# Altium PCB RP2040_IP_Block.PcbDoc
Units mm, origin at the board's own origin, x right, y up, seen from the top; angles counter-clockwise.
Board outline 50 x 30 mm, 2 copper layers (Top Layer, Bottom Layer), stack 1.65 mm thick; 45 components, 64 nets, 201 pads, 51 vias.
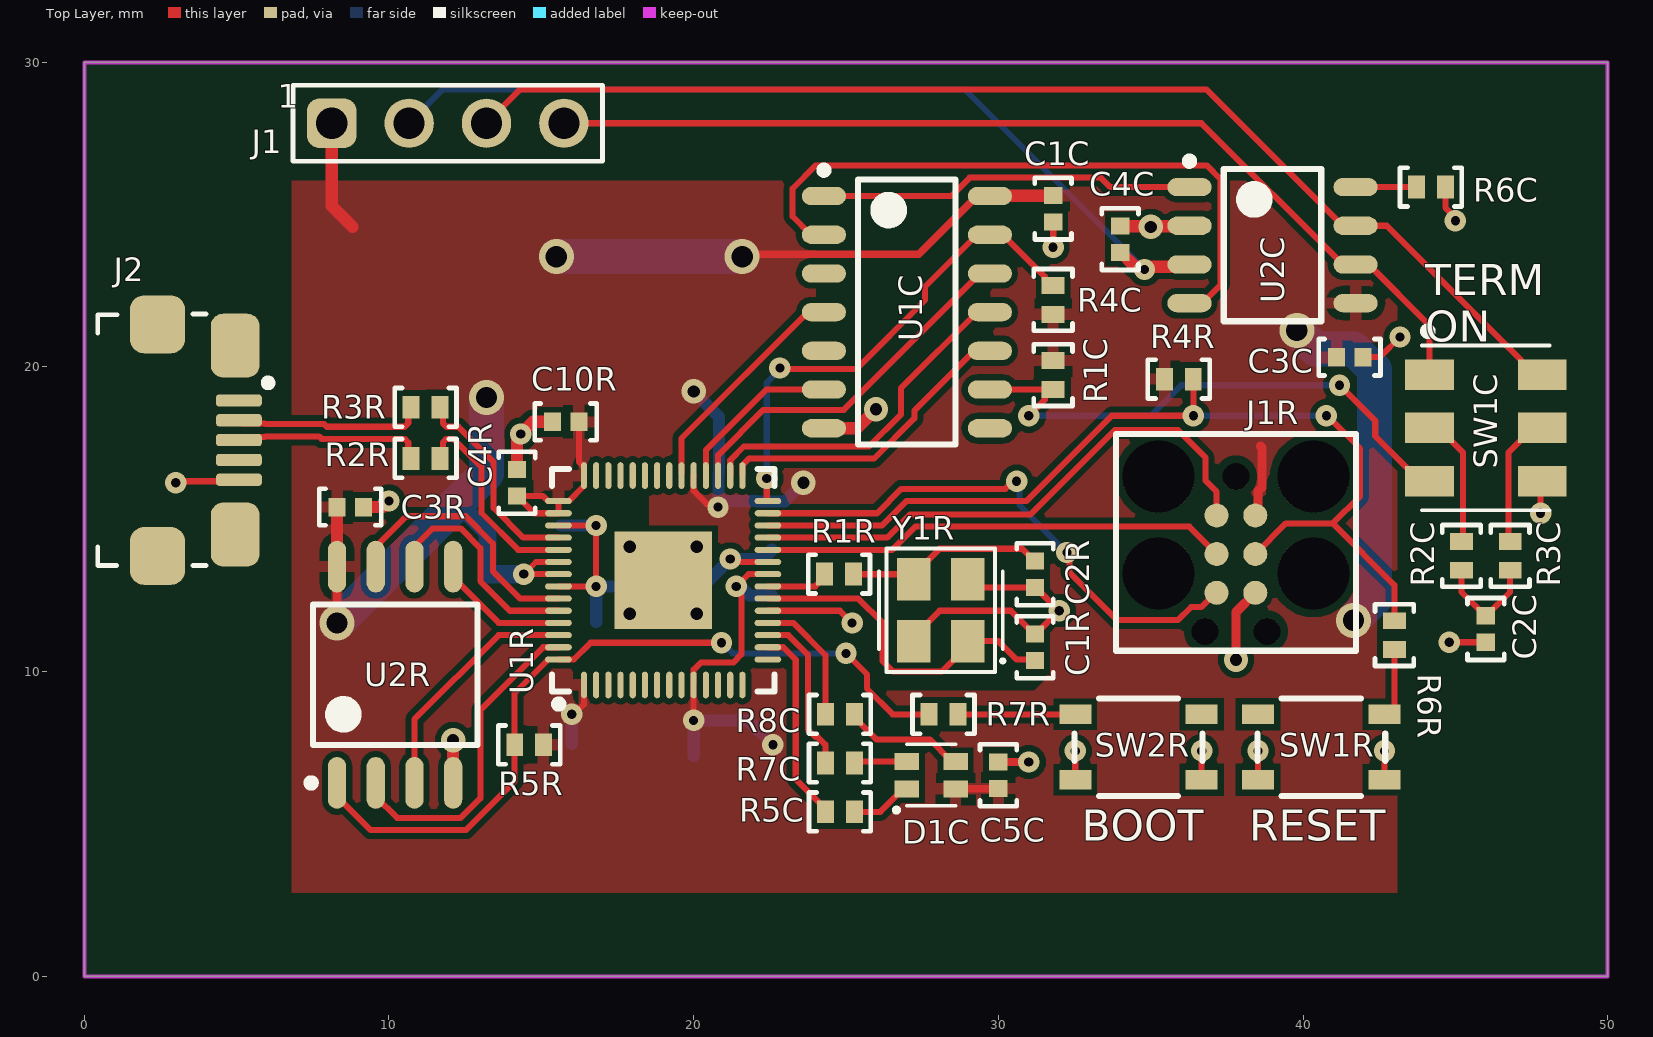
[diagram p0: Top Layer view]
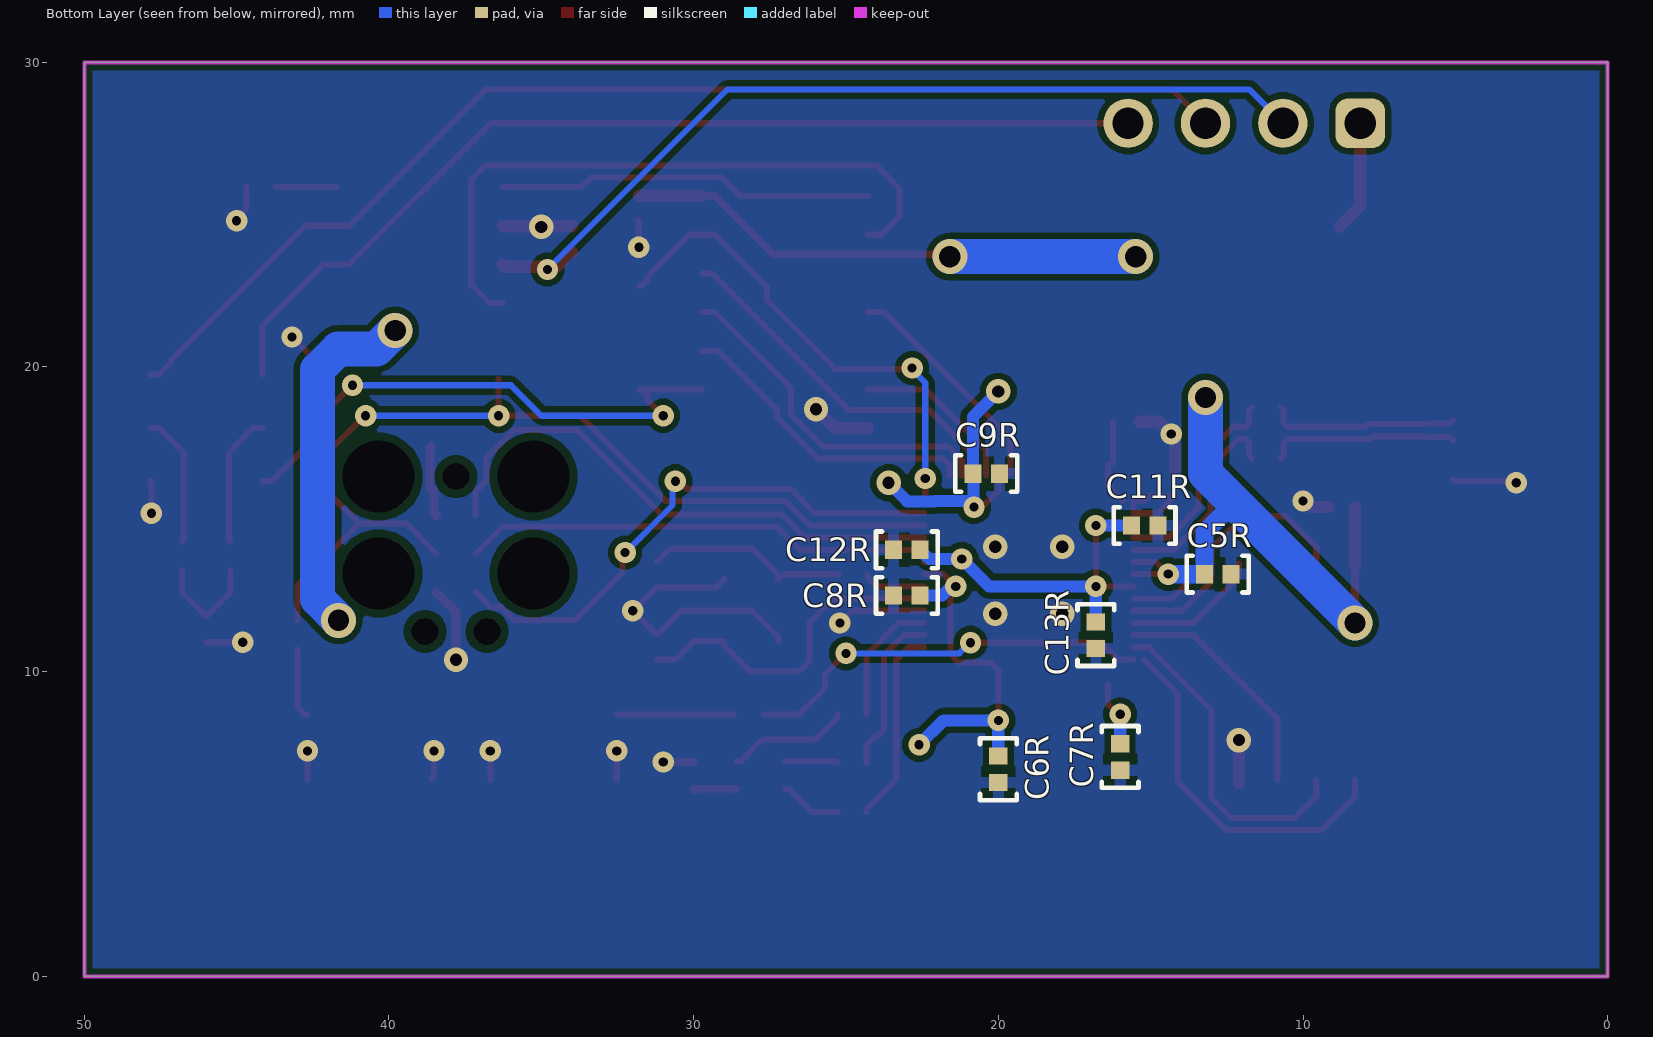
[diagram p1: Bottom Layer view, seen from below]
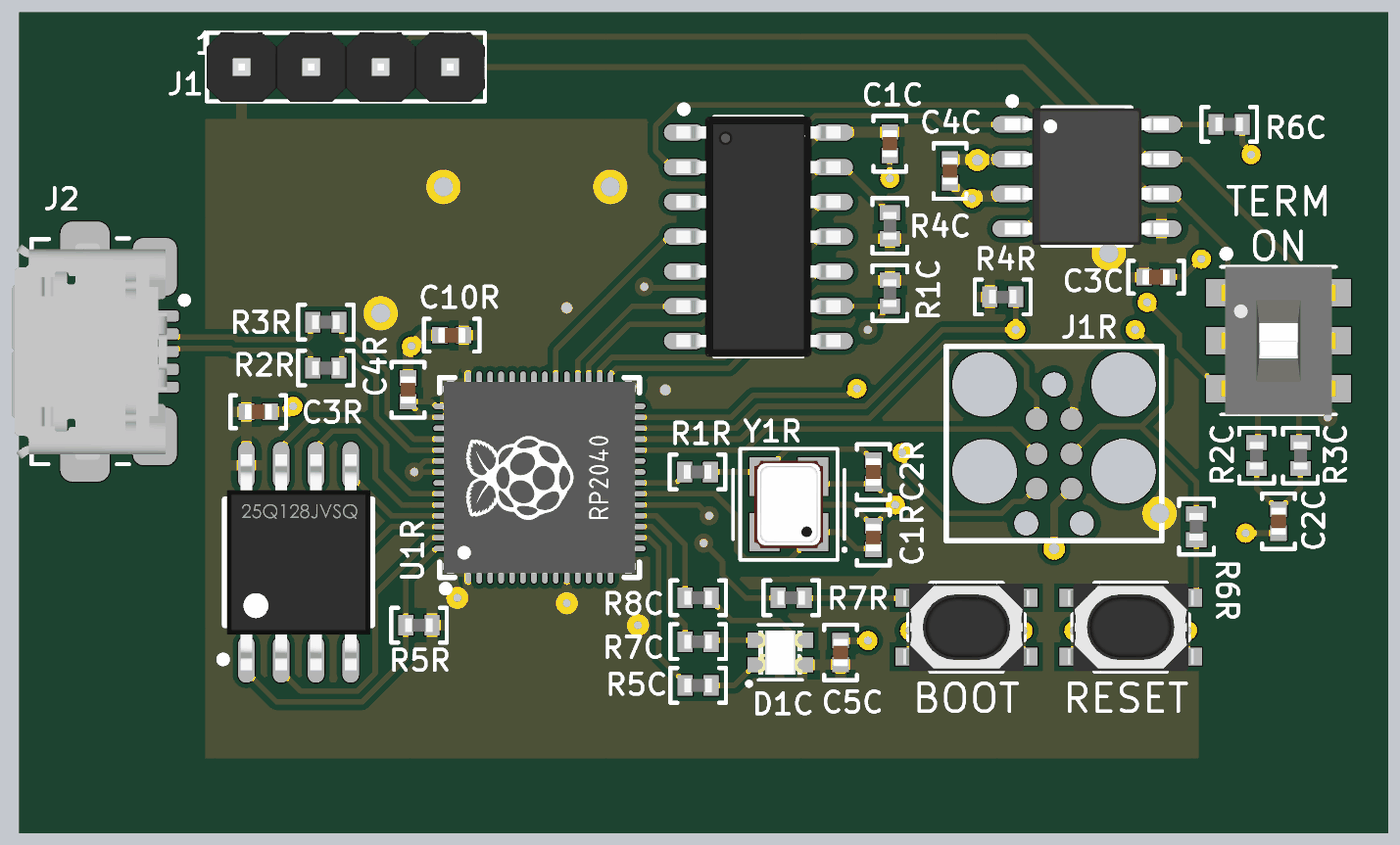
[diagram p2: 3D render of the assembled board from above, using the file's embedded part models]
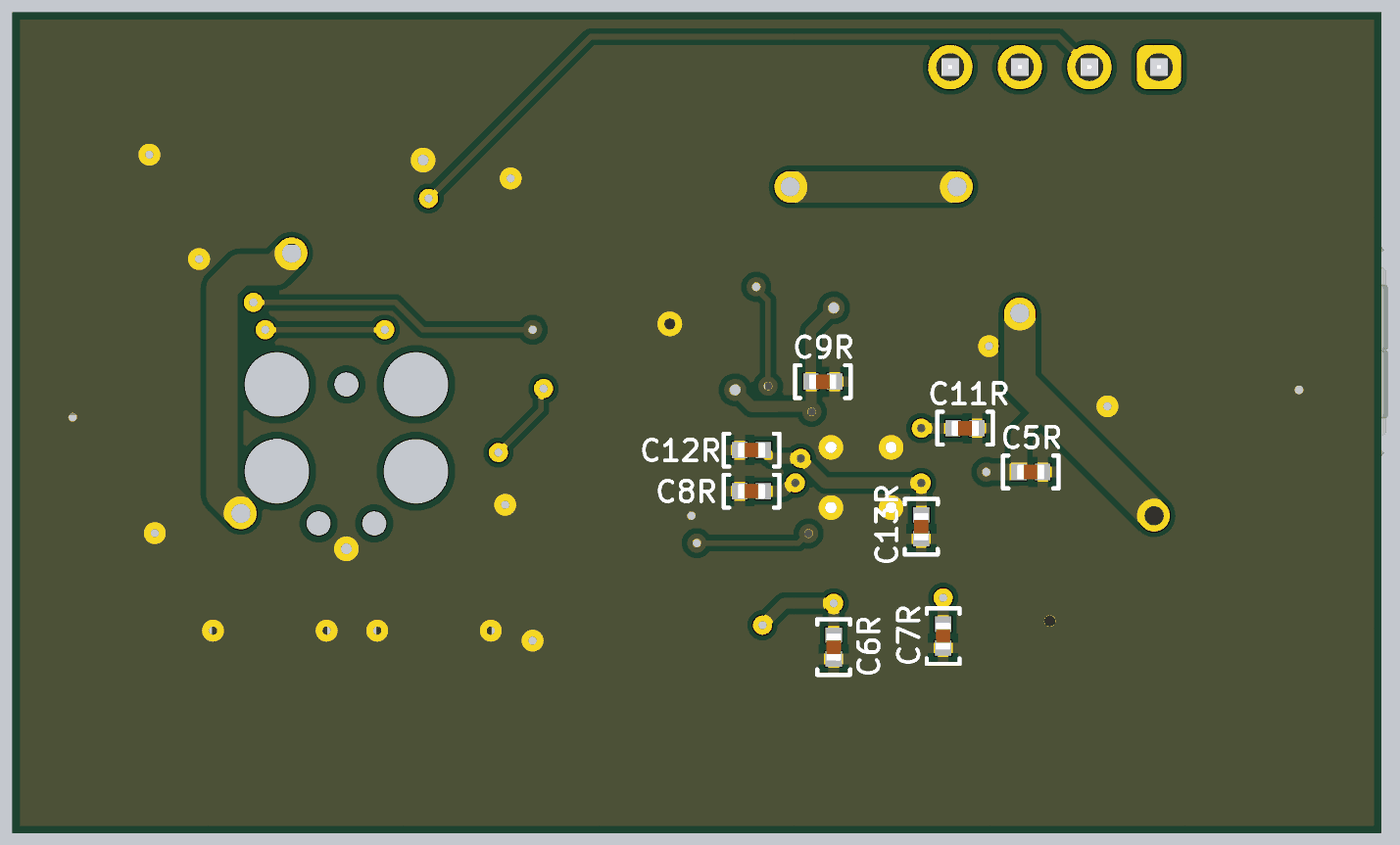
[diagram p3: 3D render of the assembled board from below, using the file's embedded part models]

## Layer stack, top to bottom
Top Solder: solder mask 0.0127, Solder Resist, Dk 3.8
Top Layer: signal copper 0.075
Dielectric: core 1.5, FR-4, Dk 4.5
Bottom Layer: signal copper 0.075
Bottom Solder: solder mask 0.0127, Solder Resist, Dk 3.8

## Board outline
0,0 50,0 50,30 0,30

## Design rules (kind name [scope] priority, off if disabled: settings)
BoardOutlineClearance "BoardOutlineClearance JLCPCB" [All] p1: gap=0.2 ignorepadtopadclearanceinfootprint=FALSE
Clearance "Clearance JLCPCB 2oz" [All] p1: gap=0.2 ignorepadtopadclearanceinfootprint=FALSE except(0.254: Arc-Hole Track-Hole SMDPad-Hole THPad-Hole Via-Hole Fill-Hole Poly-Hole Region-Hole Text-Hole)
ComponentClearance [All] p1: gap=0.15 collisioncheckmode=3 verticalgap=0.25 showdistances=FALSE
DiffPairsRouting [All] p1: maxlimit=0.25 minlimit=0.2 mostfreqgap=0.2 toplayer_minwidth=0.2 toplayer_maxwidth=0.4 toplayer_prefwidth=0.2 bottomlayer_minwidth=0.2 bottomlayer_maxwidth=0.4 bottomlayer_prefwidth=0.2 maxuncoupledlength=12.7
HoleSize "HoleSize JLCPCB Pad" [IsPad] p1: absolutevalues=TRUE maxlimit=6.3 minlimit=0.5 maxpercent=80.000 minpercent=20.000
HoleSize "HoleSize JLCPCB 2 layer" [All] p2: absolutevalues=TRUE maxlimit=6.3 minlimit=0.3 maxpercent=80.000 minpercent=20.000
HoleToHoleClearance "HoleToHoleClearance JLCPCB" [All] p1: gap=0.254 allowstackedmicrovias=TRUE
MinimumAnnularRing "MinimumAnnularRing JLCPCB Pad" [IsPad] p1: minimumring=0.3
MinimumAnnularRing "MinimumAnnularRing JLCPCB 2oz" [All] p2: minimumring=0.2
MinimumSolderMaskSliver [All] p1: minsoldermaskwidth=0.025
PlaneConnect [All] p1: pad.planeconnectstyle=Relief pad.reliefexpansion=0.508 pad.reliefentries=4 pad.reliefconductorwidth=0.254 pad.reliefairgap=0.254 via.planeconnectstyle=Direct via.reliefexpansion=0.508 via.reliefentries=4 via.reliefconductorwidth=0.254 via.reliefairgap=0.254
PolygonConnect [All] p1: thpad.connectstyle=Relief thpad.reliefconductorwidth=0.381 thpad.reliefentries=4 thpad.polygonreliefangle="45 Angle" thpad.airgapwidth=0.254 smdpad.connectstyle=Relief smdpad.reliefconductorwidth=0.381 smdpad.reliefentries=4 smdpad.polygonreliefangle="90 Angle" smdpad.airgapwidth=0.254 via.connectstyle=Direct via.reliefconductorwidth=0.254 via.reliefentries=4 via.polygonreliefangle="90 Angle" via.airgapwidth=0.254
RoutingVias "RoutingVias JLCPCB" [All] p1: holewidth=0.4 width=0.8 viastyle="Through Hole" minholewidth=0.3 minwidth=0.4 maxholewidth=0.711 maxwidth=1.27
SilkToSilkClearance [All] p1: silktosilkclearance=0.076
SilkToSolderMaskClearance "SilkToSolderMaskClearance JLCPCB" [IsPad] p1: minsilkscreentomaskgap=0.15 clearancetoexposedcopper=TRUE
SolderMaskExpansion "SolderMaskExpansion JLCPCB" [All] p1: expansion=0.05 istentingtop=FALSE
Width "Width JLCPCB 2oz" [All] p1: maxlimit=5.08 minlimit=0.2 preferedwidth=0.254 minimp=50.000000 maximp=50.000000 favimp=50.000000
22 further rules are at their usual default settings.

## Classes and differential pairs
differential pair class "USB 2.0": USB USB_RP2040
component class U_RP2040_with_CAN: C1C C2C C3C C4C C5C D1C R1C R2C R3C R4C R5C R6C R7C R8C SW1C U1C U2C
component class U_RP2040_C: C1R C2R C3R C4R C5R C6R C7R C8R C9R C10R C11R C12R C13R J1R R1R R2R R3R R4R R5R R6R R7R SW1R SW2R U1R U2R Y1R
component class Top_Level: J2
differential pair USB: +USB_P -USB_N
differential pair USB_RP2040: +USB_RP2040_P -USB_RP2040_N

## Components (designator, comment, footprint, x,y, rotation, side; value= is the part's Value field where it differs from the comment)
C1C "100nF Ceramic 25V" CAPACITOR_0402 31.8,25.2 r270 top value=0.1uF
C1R "27pF Ceramic 50V" CAPACITOR_0402 31.2,10.8 r90 top value=27pF
C2C "4700pF Ceramic 25V" CAPACITOR_0402 46,11.4 r90 top value=4.7nF
C2R "27pF Ceramic 50V" CAPACITOR_0402 31.2,13.2 r270 top value=27pF
C3C "100nF Ceramic 25V" CAPACITOR_0402 41.529,20.32 r0 top value=0.1uF
C3R "100nF Ceramic 6.3V" CAPACITOR_0402 8.73,15.4 r0 top value=0.1uF
C4C "100nF Ceramic 25V" CAPACITOR_0402 34,24.2 r90 top value=0.1uF
C4R "1uF Ceramic 16V" CAPACITOR_0402 14.2,16.2 r90 top value=1uF
C5C "1uF Ceramic 16V" CAPACITOR_0402 30,6.6 r90 top value=1uF
C5R "100nF Ceramic 6.3V" CAPACITOR_0402 12.8,13.2 r180 bottom value=0.1uF
C6R "100nF Ceramic 6.3V" CAPACITOR_0402 20,6.8 r270 bottom value=0.1uF
C7R "100nF Ceramic 6.3V" CAPACITOR_0402 16,7.2 r270 bottom value=0.1uF
C8R "100nF Ceramic 6.3V" CAPACITOR_0402 23,12.497 r0 bottom value=0.1uF
C9R "100nF Ceramic 6.3V" CAPACITOR_0402 20.4,16.5 r180 bottom value=0.1uF
C10R "100nF Ceramic 6.3V" CAPACITOR_0402 15.8,18.2 r180 top value=0.1uF
C11R "1uF Ceramic 16V" CAPACITOR_0402 15.2,14.8 r180 bottom value=1uF
C12R "100nF Ceramic 6.3V" CAPACITOR_0402 23,14 r0 bottom value=0.1uF
C13R "100nF Ceramic 6.3V" CAPACITOR_0402 16.8,11.2 r270 bottom value=0.1uF
D1C "EAST1616RGBB4" LED_0606_4SMD 27.8,6.6 r0 top
J1 "HEADER VERT 2.54MM" HEADER_4PIN_2.54MM 8.12,28 r0 top
J1R "TagConnect SWD" TC2030-MCP 37.8,16.4 r270 top
J2 "USB_MICRO R/A" CONN_MINIUSB 2.4,17.6 r270 top
R1C "10k Ohm 1% 1/16W" RESISTOR_0402 31.8,19.735 r270 top
R1R "1k Ohm 1% 1/16W" RESISTOR_0402 24.773,13.2 r0 top
R2C "60.4 Ohm 1% 1/16W" RESISTOR_0402 45.2,13.8 r270 top
R2R "27 Ohm 1% 1/16W" RESISTOR_0402 11.2,17 r0 top
R3C "60.4 Ohm 1% 1/16W" RESISTOR_0402 46.8,13.8 r270 top
R3R "27 Ohm 1% 1/16W" RESISTOR_0402 11.2,18.677 r0 top
R4C "10k Ohm 1% 1/16W" RESISTOR_0402 31.8,22.2 r90 top
R4R "10k Ohm 1% 1/16W" RESISTOR_0402 35.925,19.6 r0 top
R5C "604 Ohm 1% 1/16W" RESISTOR_0402 24.8,5.4 r0 top
R5R "10k Ohm 1% 1/16W" RESISTOR_0402 14.6,7.6 r180 top
R6C "10k Ohm 1% 1/16W" RESISTOR_0402 44.2,25.905 r0 top
R6R "1k Ohm 1% 1/16W" RESISTOR_0402 43,11.2 r90 top
R7C "200 Ohm 1% 1/16W" RESISTOR_0402 24.8,7 r0 top
R7R "1k Ohm 1% 1/16W" RESISTOR_0402 28.2,8.6 r180 top
R8C "200 Ohm 1% 1/16W" RESISTOR_0402 24.8,8.6 r0 top
SW1C "Switch DPDT" CAS-220TA 46,18 r270 top
SW1R "434123025826" SMD_434123025826 40.6,7.525 r0 top
SW2R "434123025826" SMD_434123025826 34.6,7.525 r0 top
U1C "MCP2517FD" SOIC-14 27,21.8 r0 top
U1R "RP2040" "QFN-56 RP2040" 19,13 r90 top locked
U2C "CAN Transceiver" SOIC-8 39,24 r0 top
U2R "W25Q128JVSIQ" "SOIC-8 W25QxJV" 10.2,9.899 r90 top
Y1R "CRYSTAL 12.0000MHZ 18PF SMD" "4-SMD, NO LEAD CRYSTAL 3.2x2.5mm" 29,11 r90 top

## Footprints (in the part's own frame and the unit in brackets; to place one, negate y for a bottom-side part, rotate by r counter-clockwise, add the part's x,y. Pads: shape width x height; smd on the part's side, far side on the other; paste and mask are expansions set on the pad)
"4-SMD, NO LEAD CRYSTAL 3.2x2.5mm" [mm]
  rrect0% 1.4x1.1 smd: 1(0,0) 2(2.032,0) 3(2.032,1.778) 4(0,1.778)
  silkscreen extent -1.02,-1.2 3.05,2.92, body extent -0.58,-0.36 2.62,2.14, height 0.82
CAPACITOR_0402 [mm]
  rect 0.56x0.6 smd: 1(-0.435,0) 2(0.435,0)
  silkscreen extent -1.02,-0.6 1.02,0.6, body extent -0.5,-0.28 0.5,0.27, height 0.51
CAS-220TA [mm] "SWITCH SLIDE DPDT 100MA 6V"
  rrect0% 1x1.6 smd: 1(-1.75,-1.85) 2(0,-1.85) 3(1.75,-1.85) 4(-1.75,1.85) 5(0,1.85) 6(1.75,1.85)
  silkscreen extent -3.3,-2.1 2.7,2.1, body extent -2.7,-2.1 2.7,2.1, height 2.51
CONN_MINIUSB [mm] "USB2.0 Micro-B Receptacle SMD R/A"
  rrect50% 0.4x1.5 smd: 1(-1.3,2.675) 2(-0.65,2.675) 3(0,2.675) 4(0.65,2.675) 5(1.3,2.675)
  rrect50% 2.1x1.6 smd: 6(-3.1,2.55) 7(3.1,2.55)
  rrect50% 1.9x1.8 smd: 8(3.8,0) 9(-3.8,0)
  silkscreen extent -4.14,-1.96 4.11,3.75, body extent -3.96,-2.67 3.96,2.99, height 2.72
HEADER_4PIN_2.54MM [mm]
  rrect50% 1.62x1.62 hole 1.02: 1(0,0)
  round 1.62 hole 1.02: 2(2.54,0) 3(5.08,0) 4(7.62,0)
  silkscreen extent -1.27,-1.25 8.89,1.25, body extent -1.27,-1.27 8.89,1.27, height 10.48
LED_0606_4SMD [mm]
  rrect0% 0.8x0.55 smd: 1(-0.8,-0.45) 2(-0.8,0.45) 3(0.8,0.45) 4(0.8,-0.45)
  silkscreen extent -1.22,-1.22 0.8,1.02, body extent -0.8,-0.8 0.8,0.8, height 0.35
"QFN-56 RP2040" [mm] "QFN, 56-Leads, Body 7.00x7.00mm, Pitch 0.40mm, Thermal Pad 3.10x3.10mm, IPC Medium Density"
  oval 0.875x0.2 smd: 1(-3.437,2.6) 2(-3.437,2.2) 3(-3.437,1.8) 4(-3.437,1.4) 5(-3.437,1) 6(-3.437,0.6) 7(-3.437,0.2) 8(-3.437,-0.2) 9(-3.437,-0.6) 10(-3.437,-1) 11(-3.437,-1.4) 12(-3.437,-1.8) 13(-3.437,-2.2) 14(-3.437,-2.6) 29(3.437,-2.6) 30(3.437,-2.2) 31(3.437,-1.8) 32(3.437,-1.4) 33(3.437,-1) 34(3.437,-0.6) 35(3.437,-0.2) 36(3.437,0.2) 37(3.437,0.6) 38(3.437,1) 39(3.437,1.4) 40(3.437,1.8) 41(3.437,2.2) 42(3.437,2.6)
  oval 0.2x0.875 smd: 15(-2.6,-3.437) 16(-2.2,-3.437) 17(-1.8,-3.437) 18(-1.4,-3.437) 19(-1,-3.437) 20(-0.6,-3.437) 21(-0.2,-3.437) 22(0.2,-3.437) 23(0.6,-3.437) 24(1,-3.437) 25(1.4,-3.437) 26(1.8,-3.437) 27(2.2,-3.437) 28(2.6,-3.437) 43(2.6,3.437) 44(2.2,3.437) 45(1.8,3.437) 46(1.4,3.437) 47(1,3.437) 48(0.6,3.437) 49(0.2,3.437) 50(-0.2,3.437) 51(-0.6,3.437) 52(-1,3.437) 53(-1.4,3.437) 54(-1.8,3.437) 55(-2.2,3.437) 56(-2.6,3.437)
  rect 3.2x3.2 smd: 57(0,0)
  silkscreen extent -4.19,-3.65 3.65,3.65, body extent -3.52,-3.52 3.52,3.52, height 0.85
RESISTOR_0402 [mm] "Resistor 0402"
  rect 0.55x0.75 smd: 1(-0.475,0) 2(0.475,0)
  silkscreen extent -1.02,-0.64 1.02,0.64, body extent -0.5,-0.25 0.5,0.25, height 0.25
SMD_434123025826 [mm]
  rect 1.05x0.65 smd: A1(-2.075,1.075) A2(2.075,1.075) B1(-2.075,-1.075) B2(2.075,-1.075)
  silkscreen extent -2.1,-1.6 2.1,1.6, body extent -2.3,-1.6 2.3,1.6, height 2.5
SOIC-8 [mm] "SOIC, 8-Leads, Body 4.90x3.90mm, Pitch 1.27mm, IPC Medium Density"
  oval 1.45x0.6 smd: 1(-2.725,1.905) 2(-2.725,0.635) 3(-2.725,-0.635) 4(-2.725,-1.905) 5(2.725,-1.905) 6(2.725,-0.635) 7(2.725,0.635) 8(2.725,1.905)
  silkscreen extent -2.85,-2.5 1.6,2.88, body extent -3,-2.5 3,2.5, height 1.75
"SOIC-8 W25QxJV" [mm] "SOIC, 8-Leads, Body 5.28x5.28mm, Pitch 1.27mm, IPC Medium Density"
  oval 1.7x0.6 smd: 1(-3.55,1.905) 2(-3.55,0.635) 3(-3.55,-0.635) 4(-3.55,-1.905) 5(3.55,-1.905) 6(3.55,-0.635) 7(3.55,0.635) 8(3.55,1.905)
  silkscreen extent -3.67,-2.7 2.3,2.88, body extent -3.95,-2.62 3.95,2.62, height 1.95
SOIC-14 [mm] "SOIC, 14-Leads, Body 8.65x3.90mm, Pitch 1.27mm, IPC Medium Density"
  oval 1.45x0.6 smd: 1(-2.725,3.81) 2(-2.725,2.54) 3(-2.725,1.27) 4(-2.725,0) 5(-2.725,-1.27) 6(-2.725,-2.54) 7(-2.725,-3.81) 8(2.725,-3.81) 9(2.725,-2.54) 10(2.725,-1.27) 11(2.725,0) 12(2.725,1.27) 13(2.725,2.54) 14(2.725,3.81)
  silkscreen extent -2.85,-4.35 1.6,4.78, body extent -3,-4.4 3,4.4, height 1.7
TC2030-MCP [mil]
  round 31 smd: 1(50,-25) 2(50,25) 3(100,-25) 4(100,25) 5(150,-25) 6(150,25)
  round 34 hole 35 unplated: A(0,0) B(200,40) C(200,-40)
  round 92 hole 93 unplated: D(0,-100) E(125,-100) F(0,100) G(125,100)
  silkscreen extent -55,-155 225,155

## Part data
C1C C3C C3R C4C C5R C6R C7R C8R C9R C10R C12R C13R: library part CAPACITOR_0.1uF_0402, "Cap 100nF 25V +/-10% / Ceramic 0402", Supplier Part Number 1=478-7868-1-ND, Tolerance="+/- 10%", Voltage=25V, Made By="Robert Pafford", Supplier 1=Digi-Key
C1R C2R: library part CAPACITOR_0.000027uF_0402, "Cap 27pF 50V +/-5% / Ceramic 0402", Supplier Part Number 1=445-5589-1-ND, Tolerance="+/- 5%", Voltage=50V, Made By="Robert Pafford", Supplier 1=Digi-Key
C2C: library part CAPACITOR_0.0047uF_0402, "4700 pF +/-10% 25V Ceramic Capacitor X7R 0402", Supplier Part Number 1=478-6195-1-ND, Tolerance="+/- 10%", Voltage=25V, Made By="Robert Pafford", Supplier 1=Digi-Key
C4R C5C C11R: library part CAPACITOR_1uF_0402, "Cap 1uF 16V +/-10% / Ceramic 0402", Supplier Part Number 1=478-0402YD105KAT4ADKR-ND, Tolerance="+/- 10%", Voltage=16V, Made By="Robert Pafford", Supplier 1=Digi-Key
D1C: library part LED_RGB_4SMD, "LED RGB CLEAR 4SMD", Blue Forward Current=5mA, Blue Forward Voltage=2.8V, Color=RGB, Package=4-SMD, Red Forward Voltage=1.8V, Supplier Part Number 1=1080-1552-1-ND, ComponentLink1Description=Datasheet, ComponentLink1URL=https://everlightamericas.com/index.php?controller=attachment&id_attachment=3220, Green Forward Current=5mA, Green Forward Voltage=2.8V, Made By="Robert Pafford", Red Forward Current=5mA, Supplier 1=Digi-Key
J1: library part HEADER_4PIN_2.54MM, "CONN HEADER VERT 4POS 2.54MM", Supplier Part Number 1=S1012E-04-ND, Made By="Robert Pafford", Supplier 1=Digi-Key
J1R: library part TC2030_SWD, "TagConnect TC2030 ARM SWD 6-pin"
J2: library part CONN_MICROUSB, "Amphenol Micro USB-B / USB2.0 5 Pin Right Angle SMD", Color=Silver, Current Per Pin=1.8A, Manufacturer=Amphenol, Supplier Part Number 1=609-4613-1-ND, ComponentLink1Description=Datasheet, ComponentLink1URL=https://cdn.amphenol-icc.com/media/wysiwyg/files/documentation/datasheet/inputoutput/io_usb_micro.pdf?__cf_chl_jschl_tk__=05693735e19256298f6ef6ca2bb2e65c376a4f56-1625503833-0-Abitsb0-ufjOXJYs_S3J3r2iTn-nObalbmXUksF1VvO_h_WEmRdMlUD1I8-hmWSEVWzY1pirKnrPZWfgY3851qyBZe5ZvnNQePLGIzUgdEIQBVUyW36RsbYpDLEWxJ4horD-5gChFgobLYqwmG5aHl0E8lIn_twwPPrOxilK2gP0q9t_CNOs_u5fMqXvXUrlsOv8tIE2NRlu6NVP8qtkL2GjhlkeTUbDMF8WvvpPDTFOgvZ4Y16Ej8F8AhWos88mo5B1HssXozw0XrkJQIqERITUu6rqloz9kf4ZzhBHtDAt-IkiAFY_Ds9SW8FYKKTtINJVpHZQ6Gyu1FFM4Dc9MO0maE8_mmNcwlxqyRoRk_MPWW8VyByXWM5RSp52jteRKw7FeI9WIYvCbPAOy0Eyib-aseIQsnGbglBcUY6_2xp8GYaJM38H3dNvBPsSOfJBPndKedwKHllxjkucXn6xsN0sDXkpGN-cu8_2bDTJ0g-uUucKSCooYX-ApSDNGpkA_p9zv1SOAD8c0zaZVmtiBsN75QpVz2rzq9_BFxOywPvR, Configuration="Right Angle", Created By="Flip B", Number of Positions=5, Pitch=0.65mm, Series=10118192, Supplier 1=Digi-Key
R1C R4C R4R R5R R6C: library part RESISTOR_10K_0402, "RES 10k OHM 1% 1/16W 0402", Digikey Part Numer=CR0603-JW-104ELFTR-ND, Supplier Part Number 1=YAG3436CT-ND, Tolerance="+/- 1%", Value  (Ohms)=10K, Made By="Robert Pafford", Supplier=Digikey, Supplier 1=Digi-Key, Wattage=1/16W
R1R R6R R7R: library part RESISTOR_1K_0402, "RES 1k OHM 1% 1/16W 0402", Digikey Part Numer=CR0603-JW-104ELFTR-ND, Supplier Part Number 1=13-AC0402FR-131KLCT-ND, Tolerance="+/- 1%", Value  (Ohms)=1K, Made By="Robert Pafford", Supplier=Digikey, Supplier 1=Digi-Key, Wattage=1/16W
R2C R3C: library part RESISTOR_60.4_0402, "RES 60.4 OHM 1% 1/16W 0402", Digikey Part Numer=CR0603-JW-104ELFTR-ND, Supplier Part Number 1=13-AC0402FR-0760R4LCT-ND, Tolerance="+/- 1%", Value  (Ohms)=60.4, Made By="Robert Pafford", Supplier=Digikey, Supplier 1=Digi-Key, Wattage=1/16W
R2R R3R: library part RESISTOR_27_0402, "RES 27 OHM 1% 1/16W 0402", Digikey Part Numer=CR0603-JW-104ELFTR-ND, Supplier Part Number 1=YAG5278DKR-ND, Tolerance="+/- 1%", Value  (Ohms)=27, Made By="Robert Pafford", Supplier=Digikey, Supplier 1=Digi-Key, Wattage=1/16W
R5C: library part RESISTOR_604_0402, "RES 604 OHM 1% 1/16W 0402", Digikey Part Numer=CR0603-JW-104ELFTR-ND, Supplier Part Number 1=13-AC0402FR-07604RLCT-ND, Tolerance="+/- 1%", Value  (Ohms)=604, Made By="Robert Pafford", Supplier=Digikey, Supplier 1=Digi-Key, Wattage=1/16W
R7C R8C: library part RESISTOR_200_0402, "RES 200 OHM 1% 1/16W 0402", Digikey Part Numer=CR0603-JW-104ELFTR-ND, Supplier Part Number 1=YAG3453CT-ND, Tolerance="+/- 1%", Value  (Ohms)=200, Made By="Robert Pafford", Supplier=Digikey, Supplier 1=Digi-Key, Wattage=1/16W
SW1C: library part CAS-220TA_CAN_TERM, "GOLD SWITCH FLUSH SLIDE DPDT 100MA 6V", Current Rating="100 mA", Supplier Part Number 1=CAS220JCT-ND, Voltage Rating=6VDC, Contact Finish=Gold, Made By="Robert Pafford", Supplier 1=Digi-Key, Switch Function=DPDT
SW1R SW2R: library part "Tactile Switch SMD", "WS-TASV J-Bend SMT Tact Switch, SPST-NO, 16VDC, 50mA, 260g", Manufacturer="Wurth Elektronik", Operating Temperature Max=85°C, Operating Temperature Min=-40°C, Rated Current=50mA, Rated Voltage=16VDC, Category="Tact Switches", Circuit=SPST-NO, ComponentLink1Description="Website Link", ComponentLink1URL=https://www.we-online.com/redexpert/article/434123025826?ad, ComponentLink2Description="Datasheet Link", ComponentLink2URL=https://www.we-online.com/redexpert/spec/434123025826?ad, Contact Material="Stainless Steel", Contact Plating=Silver, Height=2.5mm, Length=4.2mm, Manufacturer Part Number=434123025826, Match Code=WS-TASV, Mount="Surface Mount", Operation Force=260g, Packaging="Tape and Reel", Terminal Material="Copper Alloy", Terminal Plating=Silver, Washable=No, Width=3.2mm
U1C: "CANbus Controller CAN 2.0 SPI Interface 14-SOIC", Made By="Robert Pafford", Max FD Rate="8 Mbps"
U1R: "Raspberry Pi RP2040", Crystal Frequency="12 MHz", Input Voltage=3.3V, Available Busses="SPI, I2C, PWM, USB", ComponentLink1Description=DigiKey, ComponentLink2Description=Datasheet, ComponentLink2URL=https://datasheets.raspberrypi.org/rp2040/rp2040-datasheet.pdf, Made By="Robert Pafford", Number of GPIOs=29
U2C: library part TJA1442AT, "CAN Interface IC High-Speed CAN Transceiver with Standby Mode", Supplier Part Number 1=771-TJA1442AT/0Z, Made By="Robert Pafford", Max Data Rate=5Mbps, Supplier 1=Mouser
U2R: "IC FLASH 128MBIT SPI/QUAD 8SOIC", Supplier Part Number 1=W25Q128JVSIQ-ND, Made By="Robert Pafford", Size=128M, Supplier 1=Digi-Key
Y1R: library part CRYSTAL_12MHz_SMD_SMALL, "12 MHz ±20ppm Crystal 18pF 100 Ohms 4-SMD, No Lead (3.2x2.5mm)", Frequency="12 MHz", Load Capacitance=18pF, Supplier Part Number 1=2151-RH100-12.000-18-2030-EXT-TRCT-ND, ESR="100 Ohms", Made By="Robert Pafford", Supplier 1=Digi-Key

## Via types
v1: diameter 0.7, hole 0.3, Top Layer to Bottom Layer, 25 vias
v2: diameter 0.7, hole 0.3, Top Layer to Bottom Layer, tented top, 10 vias
v3: diameter 0.8, hole 0.4, Top Layer to Bottom Layer, 7 vias
v4: diameter 1.15, hole 0.7, Top Layer to Bottom Layer, 6 vias
v5: diameter 0.8, hole 0.4, Top Layer to Bottom Layer, tented top, 3 vias

## Nets (pads, with @x,y where several pads share a name; then routed paths per layer and width w, separated by ;. In a path a pad name is that pad's centre, name@x,y a point inside that pad or via, vN(x,y) a via of type N, cw(c..) or ccw(c..) an arc to the next point about the centre after c; other vN are vias at no path point)
1v1_RP2040: C11R.1 C12R.1 C13R.1 U1R.23 U1R.45 U1R.50 | length 14.4
  Top Layer w0.2: U1R.50 v1(16.8,12.8) v1(16.8,14.8) U1R.45 ; v1@21.2,13.8 21.335,13.8 21.535,13.6 U1R.23
  Bottom Layer w0.4: C11R.1 v1(16.8,14.8) ; C13R.1 v1(16.8,12.8) 20.303,12.8 v1(21.2,13.697) 22.262,13.697 22.365,13.8 22.385,13.8 22.565,13.98 C12R.1
3V3_RP2CAN: C1C.1 C3C.1 C3R.1 C4R.1 C5C.1 C5R.1 C6R.1 C7R.1 C8R.1 C9R.1 C10R.1 D1C.4 J1.1 J1R.2 R1C.1 R4C.1 R4R.1 R5R.1 U1C.14 U1R.1 U1R.10 U1R.22 U1R.33 U1R.42 U1R.43 U1R.44 U1R.48 U1R.49 U2C.5 U2R.8 | length 85.3
  Top Layer w0.2: C4R.1 C4R.1@14.22,15.765 ; U1R.49 v2(14.425,13.2) 14.825,13.6 U1R.48 ; U1R.43@15.9,15.6 16.4,16.1 U1R.42 16.4,16.775 16.352,16.775 16.235,16.892 C10R.1 ; v1(16,8.6) 16.073,8.6 16.4,8.927 U1R.1 ; v1(20,8.4) U1R.10 20,10.066 20.234,10.3 20.647,10.3 21.3,10.3 21.566,10.566 21.566,12.498 21.4,12.665 v1(21.4,12.8) 21.8,13.2 U1R.22 ; U1R.33 20,15.934 20.439,15.496 20.704,15.496 v2(20.8,15.4) ; C1C.1@31.787,25.622 C1C.1 ; C4R.1@14.22,15.765 15.06,15.765 15.225,15.6 U1R.43 U1R.44 14.765,15.2 14.4,15.565 14.4,15.585 C4R.1@14.22,15.765
  Top Layer w0.25: v4(8.295,11.6) U2R.8 ; v4(21.59,23.622) 21.663,23.695 27.385,23.695 29.312,25.622 U1C.14@29.737,25.622 ; D1C.4 28.608,6.158 29.939,6.158 C5C.1@30,6.096
  Top Layer w0.254: C5C.1@30,6.096 C5C.1@30,6.15
  Top Layer w0.3: J1R.2 38.528,15.223 38.528,15.928 38.649,16.049 38.649,17.351 38.6,17.4
  Top Layer w0.4: J1.1 8.12,25.28 8.8,24.6 ; U2R.8 C3R.1 ; U1C.14@29.737,25.622 C1C.1@31.787,25.622
  Bottom Layer w0.4: C7R.1 v1(16,8.6) ; C6R.1 v1(20,8.4) 21.8,8.4 v1(22.6,7.6) ; v5(20,19.2) 20.835,18.365 C9R.1 20.817,16.482 v2@20.817,15.6 ; v2(20.8,15.4) 21,15.6 22.079,15.6 22.089,15.59 22.99,15.59 v5(23.6,16.2) ; v1(21.4,12.8) 21.535,12.8 21.838,12.497 C8R.1
  Bottom Layer w0.6: 12.247,15.552 13.235,14.565 C5R.1 v2(14.425,13.2)
  Bottom Layer w1.15: v4(8.295,11.6) 12.247,15.552 13.2,16.505 v4(13.2,19) ; v4(15.494,23.622) v4(21.59,23.622) ; v4(39.8,21.2) 40.405,20.595 41.666,20.595 42.35,19.911 42.35,12.392 41.656,11.698 v4(41.656,11.684)
5V: C4C.1 J1.2 U2C.3 | length 29.6
  Top Layer w0.4: C4C.1 34.02,23.765 34.489,23.296 34.704,23.296 v1(34.8,23.2) 34.888,23.288 36.198,23.288 U2C.3
  Bottom Layer w0.2: J1.2 11.77,29.11 28.89,29.11 v1(34.8,23.2)
CANCLK_RP2CAN: U1C.6 U1R.32 | length 5.5
  Top Layer w0.2: U1R.32 20.4,17.272 22.388,19.26 U1C.6
CANH: J1.3 SW1C.4 U2C.7 | length 39
  Top Layer w0.2: J1.3 14.31,29.11 36.825,29.11 41.3,24.635 U2C.7 42.75,24.635 47.15,20.235 47.15,20.15 47.55,19.75 SW1C.4
CANL: J1.4 SW1C.1 U2C.6 | length 32.8
  Top Layer w0.203: J1.4 36.665,28 41.3,23.365 U2C.6 42.15,23.365 44.15,21.365 SW1C.1
CANRX_RP2CAN: U1C.2 U2C.4 | length 21.5
  Top Layer w0.2: U1C.2 23.85,24.34 23.25,24.94 23.25,25.859 24.006,26.615 36.839,26.615 37.3,26.154 37.3,22.695 36.7,22.095 U2C.4
CANTX_RP2CAN: U1C.1 U2C.1 | length 12.4
  Top Layer w0.2: U1C.1 28.451,25.61 29.056,26.215 33.365,26.215 33.675,25.905 U2C.1
DBG_TX_RP2040: J1R.5 U1R.27 | length 18.2
  Top Layer w0.2: U1R.27 26.019,15.2 26.819,16 30.233,16 30.483,16.25 v1(30.6,16.25) ; v1(32.25,13.909) 32.33,13.829 32.33,13.27 33.91,11.69 35.896,11.69 36.324,12.119 36.655,12.119 37.127,12.59 J1R.5
  Bottom Layer w0.2: v1(30.6,16.25) 30.695,16.155 30.695,15.465 v1(32.25,13.909)
GND_RP2CAN: C1C.2 C1R.2 C2C.1 C2R.2 C3C.2 C3R.2 C4C.2 C4R.2 C5C.2 C5R.2 C6R.2 C7R.2 C8R.2 C9R.2 C10R.2 C11R.2 C12R.2 C13R.2 J1R.6 J2.5 R6C.2 SW1C.6 SW1R.B1 SW1R.B2 SW2R.B1 SW2R.B2 U1C.7 U1R.19 U1R.57 U2C.2 U2R.4 Y1R.2 Y1R.4 | length 36.7
  Top Layer w0.2: v2(3,16.2) 3.05,16.25 5.025,16.25 J2.5 ; v3(20.1,11.9) U1R.57@20.2,12 ; U1R.19 24.8,12 v2(25.2,11.6) ; SW2R.B1 v1(32.525,7.4) ; SW2R.B2 v1(36.675,7.4) ; SW1R.B1@38.522,6.545 38.525,6.548 v1(38.525,7.4) ; C3C.2 41.976,20.332 42.532,20.332 v1(43.184,20.984) ; SW1R.B2 v1(42.675,7.4) ; R6C.2 44.675,25.23 45,24.905 v1(45,24.8) ; v1(44.8,10.965) C2C.1 ; v2(47.8,15.2) 47.8,16.2 SW1C.6
  Top Layer w0.203: Y1R.4 27.222,11.15 28.074,12.002 30.413,12.002 31.18,11.235 C1R.2 31.22,11.235 v1@31.985,12 ; Y1R.2 29.267,12.765 C2R.2 31.22,12.765 v1@31.985,12 ; v1(31.8,23.93) C1C.2 C1C.2@31.8,24.819 ; v1(32,12) v1@31.985,12 ; SW1R.B1@38.522,6.545 SW1R.B1@38.59,6.477
  Top Layer w0.25: C5C.2 v1(31,7.035)
  Top Layer w0.3: v3(37.802,10.392) 37.802,11.957 J1R.6
  Top Layer w0.4: C3R.2 9.8,15.4 v1(10,15.6) ; U2R.4 v5(12.105,7.752) ; C4R.2 14.2,17.594 14.325,17.719 v1(14.325,17.8) 14.731,18.206 15.359,18.206 C10R.2 ; U1C.7 25.363,17.99 v3(25.987,18.613) ; C4C.2 34.018,24.617 34.983,24.617 v3(35,24.6) 35.018,24.617 36.257,24.617 U2C.2
  other v3: 17.9,11.9 17.9,14.1 20.1,14.1
INT_RP2CAN: U1C.4 U1R.34 | length 7.5
  Top Layer w0.2: U1R.34@19.6,16.5 19.6,17.658 23.742,21.8 U1C.4
LEDB_RP2CAN: R8C.1 U1R.18 | length 4.3
  Top Layer w0.2: U1R.18 23.272,11.6 24.325,10.547 R8C.1
LEDG_RP2CAN: R7C.1 U1R.17 | length 5.4
  Top Layer w0.2: U1R.17 23.106,11.2 23.75,10.556 23.75,8.101 24,7.85 24.075,7.85 24.325,7.6 R7C.1
LEDR_RP2CAN: R5C.1 U1R.16 | length 6.5
  Top Layer w0.2: U1R.16 22.941,10.8 23.35,10.391 23.35,6.475 24.325,5.5 R5C.1
MISO_RP2CAN: U1C.12 U1R.31 | length 12.1
  Top Layer w0.2: U1R.31 20.8,17.106 22.284,18.59 24.928,18.59 29.408,23.07 U1C.12
MOSI_RP2CAN: U1C.11 U1R.30 | length 11.5
  Top Layer w0.2: U1R.30 21.2,16.941 21.649,17.39 25.753,17.39 26.8,18.437 26.8,19.3 29.3,21.8 U1C.11
nCS_RP2CAN: R4C.2 U1C.13 U1R.28 | length 16.4
  Top Layer w0.2: v2(22.4,16.34) 22.4,15.6 U1R.28 ; v2(22.83,19.97) 22.87,19.93 25.33,19.93 27.593,22.193 27.593,22.633 29.3,24.34 U1C.13 30.15,24.34 31.525,22.965 31.525,22.85 31.7,22.675 R4C.2
  Bottom Layer w0.2: v2(22.4,16.34) 22.4,19.481 22.83,19.911 v2(22.83,19.97)
NetC2C_2: C2C.2 R2C.2 R3C.2 | length 3.7
  Top Layer w0.2: R2C.2 45.2,12.615 45.98,11.835 C2C.2 46.02,11.835 46.8,12.615 R3C.2
NetC2R_1: C2R.1 R1R.2 Y1R.3 | length 6.7
  Top Layer w0.203: R1R.2 27.054,13.2 Y1R.3 27.222,13.182 28.074,14.034 30.781,14.034 31.18,13.635 C2R.1
NetD1C_1: D1C.1 R5C.2 | length 2
  Top Layer w0.2: R5C.2 26.125,5.4 26.875,6.15 D1C.1
NetD1C_2: D1C.2 R7C.2 | length 1.7
  Top Layer w0.2: R7C.2 25.325,7.05 D1C.2
NetD1C_3: D1C.3 R8C.2 | length 4
  Top Layer w0.2: R8C.2 25.275,8.5 26,7.775 27.75,7.775 28.475,7.05 D1C.3
NetR2C_1: R2C.1 SW1C.2 | length 4.4
  Top Layer w0.2: SW1C.2 44.45,18 45.25,17.2 45.25,14.325 R2C.1
NetR3C_1: R3C.1 SW1C.5 | length 4.4
  Top Layer w0.2: R3C.1 46.75,14.325 46.75,17.2 47.55,18 SW1C.5
NetR6C_1: R6C.1 U2C.8 | length 2
  Top Layer w0.2: U2C.8 R6C.1
NetR6R_1: R6R.1 SW1R.A2 | length 2.3
  Top Layer w0.2: SW1R.A2 42.775,8.6 43,8.825 R6R.1
NetR7R_1: R7R.1 SW2R.A1 | length 3.8
  Top Layer w0.2: R7R.1 SW2R.A1
NetU1R_2: U1R.2
NetU1R_3: U1R.3
NetU1R_4: U1R.4
NetU1R_5: U1R.5
NetU1R_6: U1R.6
NetU1R_7: U1R.7
NetU1R_8: U1R.8
NetU1R_9: U1R.9
NetU1R_11: U1R.11
NetU1R_12: U1R.12
NetU1R_13: U1R.13
NetU1R_14: U1R.14
NetU1R_15: U1R.15
NetU1R_35: U1R.35
NetU1R_36: U1R.36
NetU1R_37: U1R.37
NetU1R_38: U1R.38
NetU1R_39: U1R.39
NetU1R_40: U1R.40
NetU1R_41: U1R.41
QSPI_SCLK_RP2040: U1R.52 U2R.6 | length 7.3
  Top Layer w0.2: U2R.6@10.835,13.55 10.835,14.1 11.435,14.7 12.354,14.7 13,14.054 13,12.97 13.97,12 U1R.52
QSPI_SD0_RP2040: U1R.53 U2R.5 | length 4.5
  Top Layer w0.2: U2R.5@12.105,13.55 12.105,13.095 13.6,11.6 U1R.53
QSPI_SD1_RP2040: U1R.55 U2R.2 | length 10.9
  Top Layer w0.2: U2R.2@9.565,6.45 9.565,5.9 10.265,5.2 10.585,5.2 10.586,5.199 12.354,5.199 13,5.845 13,8.741 15.059,10.8 U1R.55
QSPI_SD2_RP2040: U1R.54 U2R.3 | length 7.9
  Top Layer w0.2: U2R.3@10.835,6.45 10.835,8.435 13.6,11.2 U1R.54
QSPI_SD3_RP2040: U1R.51 U2R.7 | length 8.6
  Top Layer w0.2: U2R.7@9.565,13.55 9.565,14.1 10.565,15.1 12.519,15.1 13.412,14.207 13.412,13.293 14.306,12.4 U1R.51
QSPI_SS_RP2040: R5R.2 R7R.2 U1R.56 U2R.1 | length 25.6
  Top Layer w0.2: U2R.1@8.295,6.45 8.295,5.9 9.396,4.799 12.519,4.799 14.125,6.404 R5R.2 14.125,9.3 U1R.56@15.225,10.4 ; U1R.56 16.066,10.4 16.616,10.95 v2(20.916,10.95) ; v2(25,10.6) 25.689,9.911 25.689,9.443 26.532,8.6 R7R.2
  Bottom Layer w0.2: v2(20.916,10.95) 20.933,10.95 21.283,10.6 v2(25,10.6)
RUN_RP2040: J1R.4 R4R.2 R6R.2 U1R.26 | length 32.4
  Top Layer w0.2: U1R.26 26.184,14.8 26.984,15.6 30.919,15.6 33.719,18.4 v1(36.4,18.4) R4R.2 ; J1R.4 39.44,14.865 40.976,14.865 ; v1(40.766,18.4) 40.8,18.4 41.875,17.325 41.875,15.764 40.976,14.865 ; R6R.2 43,12.841 40.976,14.865
  Bottom Layer w0.2: v1(36.4,18.4) v1(40.766,18.4)
SCK_RP2CAN: U1C.10 U1R.29 | length 10.2
  Top Layer w0.2: U1R.29 21.6,16.775 21.815,16.99 25.919,16.99 27.245,18.317 27.245,18.565 29.211,20.53 U1C.10
SWCLK_RP2040: J1R.3 U1R.24 | length 15.4
  Top Layer w0.2: U1R.24 26.516,14 27.276,14.76 36.265,14.76 J1R.3
SWDIO_RP2040: J1R.1 U1R.25 | length 18.3
  Top Layer w0.2: U1R.25 26.35,14.4 27.11,15.16 31.057,15.16 33.832,17.935 35.896,17.935 36.795,17.036 36.795,16.276 37.165,15.906 J1R.1
TERM_DET_RP2CAN: R1C.2 SW1C.3 U1C.9 | length 18.4
  Top Layer w0.2: U1C.9 R1C.2@31.7,19.26 ; v2(31,18.4) 31.525,18.925 31.525,19.085 R1C.2@31.7,19.26 ; R1C.2 R1C.2@31.7,19.26 ; v1(41.2,19.4) 42.37,18.23 42.37,17.73 43.85,16.25 SW1C.3
  Bottom Layer w0.2: v2(31,18.4) 35,18.4 36,19.4 v1(41.2,19.4)
USB_N: J2.2 R3R.1 | length 6.3
  Top Layer w0.2: J2.2 5.175,18.15 5.917,18.15 5.942,18.125 7.872,18.125 7.959,18.038 10.513,18.038 10.63,18.155 10.63,18.582 R3R.1
USB_P: J2.3 R2R.1 | length 6.3
  Top Layer w0.2: J2.3 5.175,17.7 5.917,17.7 5.942,17.725 7.707,17.725 7.793,17.638 10.513,17.638 10.63,17.521 10.63,17.095 R2R.1
USB_RP2040_N: R3R.2 U1R.46 | length 6.8
  Top Layer w0.2: R3R.2 11.77,18.582 11.77,18.155 11.887,18.038 12.277,18.038 13.436,16.879 13.436,15.373 14.409,14.4 U1R.46
USB_RP2040_P: R2R.2 U1R.47 | length 6.8
  Top Layer w0.2: R2R.2 11.77,17.095 11.77,17.521 11.887,17.638 12.111,17.638 13.036,16.713 13.036,15.208 14.244,14 U1R.47
XIN_RP2040: C1R.1 U1R.20 Y1R.1 | length 11.3
  Top Layer w0.2: U1R.20 25.4,12.4 26.2,11.6 26.2,10.348 26.548,10 28.15,10 29,10.85 Y1R.1 29.998,11 30.6,10.398 31.168,10.398 C1R.1
XOUT_RP2040: R1R.1 U1R.21 | length 2.1
  Top Layer w0.2: U1R.21 23.998,12.8 24.298,13.1 R1R.1
pads on no net: J1R.A J1R.B J1R.C J1R.D J1R.E J1R.F J1R.G J2.1 J2.4 J2.6 J2.7 J2.8 J2.9 SW1R.A1 SW2R.A2 U1C.3 U1C.5 U1C.8

## Polygon pours and split planes (outlines as drawn)
GND_RP2CAN on Bottom Layer "GND" (solid, pour order 1): 0,0 50,0 50,30 0,30
3V3_RP2CAN on Top Layer "3V3_RP2040" (solid, pour order 0): 6.8,26.106 43.09,26.106 43.09,2.738 6.8,2.738

## Keep-outs
Keep-Out Layer:
  the board outline again, w0.127

## Other copper
Top Layer:
  pour cut-out: 38.877,16.455 38.774,16.182 38.774,15.347 38.927,15.193 39.689,15.193 39.689,15.828 39.435,16.082
  pour cut-out: 26.106,9.889 26.107,9.888 26.107,9.37 31.202,9.398 31.494,9.691 31.494,9.809 30.591,9.809 29.98,10.42 29.417,10.42 29.035,10.038 28.781,10.038
  pour cut-out: 29.464,26.035 24.13,26.035 24.003,25.908 24.003,19.558 27.559,19.558 29.845,21.082
  pour cut-out: 18.536,10.214 18.542,10.22 18.542,15.725 17.206,15.725 16.512,15.031 16.512,13.187 16.129,12.804 16.129,10.264
  pour cut-out: 20.828,12.934 22.098,11.664 22.098,10.521 19.812,10.521 19.812,11.41

## Silkscreen, mask and mechanical layers (free items; w line width, h text height)
Top Overlay:
  text "TERM / ON" at 44.011,20.828 h1.02
  text "BOOT" at 32.738,4.457 h1.02
  text "RESET" at 38.23,4.457 h1.02

## Text inside footprints (layer, text, board x,y; h text height)
J1: Top Overlay "1" at 6.342,28.508 h0.76